# Altium PCB tester.PcbDoc
Units mm, origin at the board's own origin, x right, y up, seen from the top; angles counter-clockwise.
Board outline 84.15 x 90.65 mm, 4 copper layers (Top Layer, Layer 2, Layer 3, Bottom Layer), stack 1.369 mm thick; 130 components, 131 nets, 539 pads, 0 vias.
Unrouted connection lines stored in the file: 361.
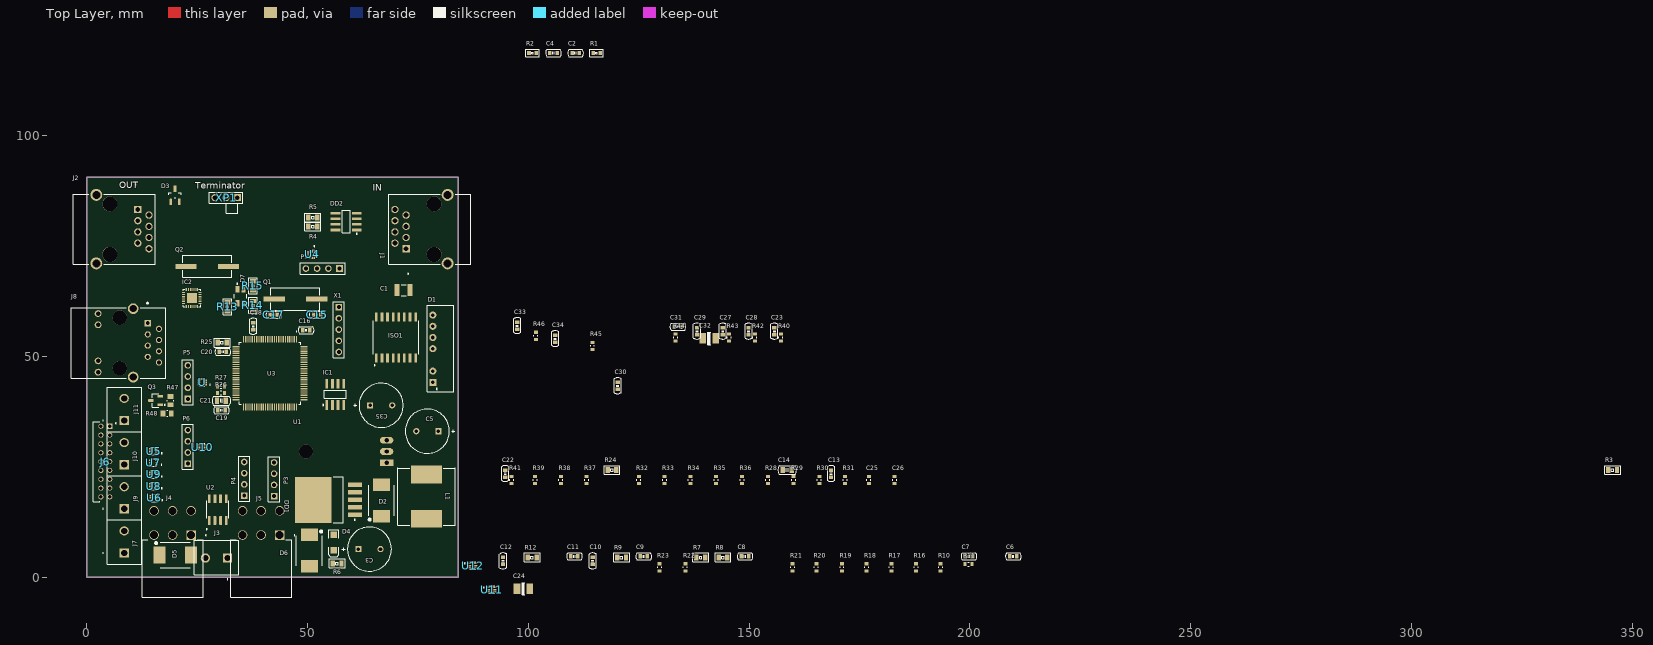
[diagram p0: Top Layer view]
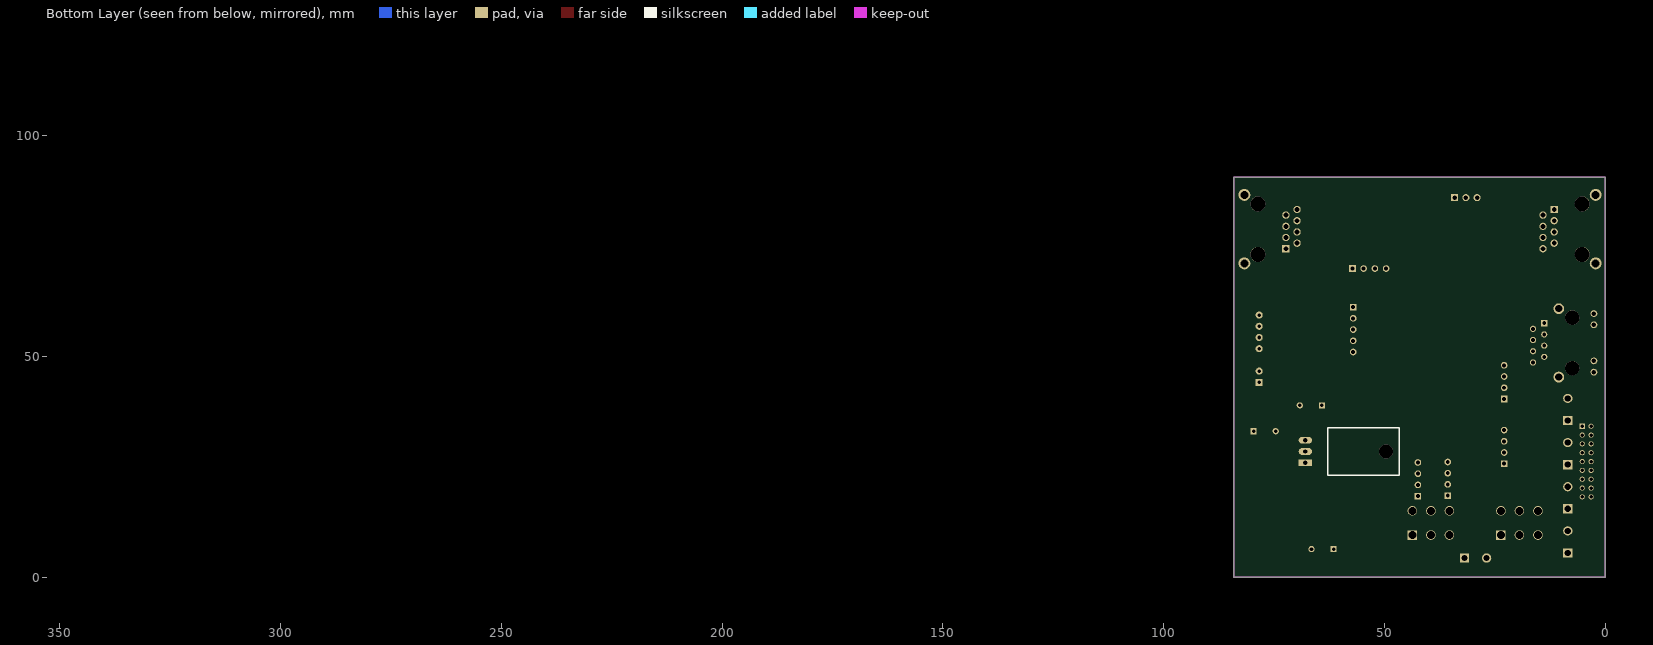
[diagram p1: Bottom Layer view, seen from below]

## Layer stack, top to bottom
Top Solder: solder mask 0.0254, SM-001, Dk 4
Top Layer: signal copper 0.035
Dielectric 1: prepreg 0.1295, PP-017, Dk 4.3
Dielectric 2: prepreg 0.1295, PP-017, Dk 4.3
Layer 2: signal copper 0.035
Dielectric 3: core 0.7112, Core-039, Dk 4.8
Layer 3: signal copper 0.035
Dielectric 4: prepreg 0.1295, PP-017, Dk 4.3
Dielectric 5: prepreg 0.1295, PP-017, Dk 4.3
Bottom Layer: signal copper 0.035
Bottom Solder: solder mask 0.0254, SM-001, Dk 4

## Board outline
0,0 0,90.65 84.15,90.65 84.15,0

## Design rules (kind name [scope] priority, off if disabled: settings)
Clearance Clearance_1 [InNetClass('ISO') vs InNet('GND')] p1: gap=1 ignorepadtopadclearanceinfootprint=FALSE
Clearance [All] p2: gap=0.15 ignorepadtopadclearanceinfootprint=FALSE
ComponentClearance [InComponentClass('J*') vs InComponentClass('J*')] p1: gap=0.01 collisioncheckmode=3 verticalgap=0.01 showdistances=FALSE
DiffPairsRouting [All] p1: maxlimit=0.254 minlimit=0.2 mostfreqgap=0.254 toplayer_minwidth=0.25 toplayer_maxwidth=0.381 toplayer_prefwidth=0.381 midlayer1_minwidth=0.25 midlayer1_maxwidth=0.381 midlayer1_prefwidth=0.381 midlayer2_minwidth=0.25 midlayer2_maxwidth=0.381 midlayer2_prefwidth=0.381 bottomlayer_minwidth=0.25 bottomlayer_maxwidth=0.381 bottomlayer_prefwidth=0.381 maxuncoupledlength=12.7
HoleSize [All] p1: absolutevalues=TRUE maxlimit=5 minlimit=0.025 maxpercent=80.000 minpercent=20.000
MinimumSolderMaskSliver [All] p1: minsoldermaskwidth=0
PolygonConnect [All] p1: connectstyle=Relief reliefconductorwidth=0.254 reliefentries=4 polygonreliefangle="90 Angle" airgapwidth=0.254
RoutingVias [All] p1: holewidth=0.3 width=1 viastyle="Through Hole" minholewidth=0.3 minwidth=0 maxholewidth=1 maxwidth=4
SilkToSolderMaskClearance [IsPad] p1: minsilkscreentomaskgap=0.1 clearancetoexposedcopper=TRUE
SolderMaskExpansion [All] p1: expansion=0.102 istentingtop=FALSE
UnRoutedNet [All] p1: checkbadconnections=TRUE
Width [All] p1: maxlimit=4 minlimit=0.254 preferedwidth=0.254
24 further rules are at their usual default settings.

## Classes and differential pairs
differential pair 485: +485_P -485_N
differential pair P1_TX: +P1_TX_P -P1_TX_N
differential pair P1_RX: +P1_RX_P -P1_RX_N

## Components (designator, comment, footprint, x,y, rotation, side; value= is the part's Value field where it differs from the comment)
C1 "10uF" CAPC3225X270N 71.775,65.05 r180 top
C2 "0.1uF" "CAPACITOR 0603" 109.923,118.727 r0 top
C3 "220uF 50v" "ECR 10x13mm" 64.05,6.4 r0 top value=220uF
C4 "0.1uF" "CAPACITOR 0603" 104.922,118.727 r0 top
C5 "220uF 50v" "ECR 10x13mm" 77.15,33.1 r180 top value=220uF
C6 "0.1uF" "CAPACITOR 0603" 209.019,4.752 r0 top
C7 "0.1uF" "CAPACITOR 0603" 198.994,4.752 r0 top
C8 "0.1uF" "CAPACITOR 0603" 148.291,4.752 r0 top
C9 "0.001uF" "CAPACITOR 0603" 125.34,4.752 r0 top
C10 "0.1uF" "CAPACITOR 0603" 114.565,2.927 r90 top
C11 "0.1uF" "CAPACITOR 0603" 109.664,4.752 r0 top
C12 "0.1uF" "CAPACITOR 0603" 94.289,2.927 r90 top
C13 "0.1uF" "CAPACITOR 0603" 168.562,22.702 r90 top
C14 "2.2uF" "CAPACITOR 0805" 157.636,24.302 r0 top
C15 "20pF" "CAPACITOR 0603" 53,59.425 r180 top
C16 "0.1uF" "CAPACITOR 0603" 50.525,55.975 r180 top
C17 "20pF" "CAPACITOR 0603" 41.575,59.425 r0 top
C18 "0.001uF" "CAPACITOR 0603" 37.725,57.675 r270 top
C19 "0.1uF" "CAPACITOR 0603" 31.35,37.85 r180 top
C20 "0.1uF" "CAPACITOR 0603" 31.675,51.075 r180 top
C21 "2.2uF" "CAPACITOR 0805" 29.525,40 r0 top
C22 "0.1uF" "CAPACITOR 0603" 94.783,22.702 r90 top
C23 "0.1uF" "CAPACITOR 0603" 155.733,54.927 r90 top
C24 "Cap T" "TECAP B" 98.9,-2.575 r0 top value="10 mkF"
C25 "100 nF" CAPCHIP0603 177.112,22.052 r90 top
C26 "100 nF" CAPCHIP0603 182.938,22.052 r90 top
C27 "0.1uF" "CAPACITOR 0603" 144.057,54.927 r90 top
C28 "0.1uF" "CAPACITOR 0603" 149.883,54.927 r90 top
C29 "0.1uF" "CAPACITOR 0603" 138.207,54.927 r90 top
C30 "0.1uF" "CAPACITOR 0603" 120.25,42.575 r90 top
C31 "1uF" "CAPACITOR 0603" 133.057,56.752 r0 top
C32 "TECAP B 10u 16V" "TECAP B" 140.982,54.102 r0 top
C33 "20pF" "CAPACITOR 0603" 97.5,56.2 r90 top
C34 "20pF" "CAPACITOR 0603" 106.075,53.25 r90 top
C35 "220uF 50v" "ECR 10x13mm" 66.7,38.95 r0 top value=220uF
D1 "AM1DS-0505SJZ" AM2D-NZ 78.4,44.155 r90 top
D2 "MBRS540T3G" DIOM7958X213N 66.775,17.4 r90 top
D3 "SM712" SOT23 20.025,86.5 r0 top
D4 "LED2" 3.2X1.6X1.1 55.975,7.875 r270 top
D5 "MBRS540T3G" DIOM7958X213N 20.075,5.075 r0 top
D6 "MBRS540T3G" DIOM7958X213N 50.45,6.05 r270 top
D7 "150141M173100" LED_150141M173100 34.825,63.65 r90 top
DD1 "LM2596S-ADJ" TO-263 54.75,17.55 r180 top
DD2 "MAX485" NSO8 58.775,80.575 r180 top
IC1 "GD25Q16CTIGR" NSO8 56.3,41.425 r90 top
IC2 "LAN8742A-CZ-TR" LAN8742A 22.575,64.525 r270 top
ISO1 "D?" *SOIC127P1030X265-16N 70.05,54.325 r90 top
J1 "A-2004-2-4-LPS-N-R" ASSMANN_A-2004-2-4-LPS-N-R 78.7,78.85 r90 top
J2 "A-2004-2-4-LPS-N-R" ASSMANN_A-2004-2-4-LPS-N-R 5.25,78.85 r270 top
J3 "TB003-500-P02BE" CUI_TB003-500-P02BE 31.9,4.375 r180 top
J4 "1586041-6" TE_1586041-6 23.675,9.575 r180 top
J5 "1586041-6" TE_1586041-6 43.725,9.575 r180 top
J6 "1-1734507-8" TE_1-1734507-8 5.25,18.225 r90 top
J7 "TB003-500-P02BE" CUI_TB003-500-P02BE 8.525,5.525 r90 top
J8 "HR911105A" HANRUN_HR911105A 7.5,53.1 r90 top
J9 "TB003-500-P02BE" CUI_TB003-500-P02BE 8.525,15.525 r90 top
J10 "TB003-500-P02BE" CUI_TB003-500-P02BE 8.525,25.525 r90 top
J11 "TB003-500-P02BE" CUI_TB003-500-P02BE 8.525,35.525 r90 top
L1 "SRR1208-6R5ML" SRR1208 76.975,18.275 r90 top
P1 "OLED" HDR1X4 57.28,69.925 r180 top
P3 "FAN1" HDR1X4 42.45,18.395 r90 top
P4 "FAN2" HDR1X4 35.7,18.51 r90 top
P5 "Encoder" HDR1X4 22.925,40.395 r90 top
P6 "Button" HDR1X4 22.925,25.73 r90 top
Q1 "12MHz" HC49SM 47.3,63.025 r0 top
Q2 "25MHz" HC49SM 27.325,70.425 r180 top
Q3 "IRLML5103TRPBF" SOT95P237X112-3N 15.625,40.05 r180 top
R1 "3K" "Resistor 0603" 114.673,118.727 r0 top
R2 "1K" "Resistor 0603" 100.172,118.727 r0 top
R3 "120" "Resistor 0805" 344.52,24.302 r0 top
R4 "10" "Resistor 0805" 52.225,79.45 r180 top
R5 "10" "Resistor 0805" 50.225,81.475 r0 top
R6 "10K" "Resistor 0805" 55.725,3.175 r0 top
R7 "10K" "Resistor 0805" 138.066,4.527 r0 top
R8 "10K" "Resistor 0805" 143.091,4.527 r0 top
R9 "10" "Resistor 0805" 120.14,4.527 r0 top
R10 "0" RESCHIP0603 193.394,2.277 r90 top
R11 "0" RESCHIP0603 199.694,3.002 r0 top
R12 "510" "Resistor 0805" 99.889,4.527 r0 top
R13 "3.9k" "Resistor 0805" 31.925,60.275 r90 top
R14 "3.9k" "Resistor 0805" 37.675,60.575 r90 top
R15 "3.9k" "Resistor 0805" 37.675,67.025 r270 top
R16 "NC" RESCHIP0603 187.818,2.277 r90 top
R17 "NC" RESCHIP0603 182.218,2.277 r90 top
R18 "0" RESCHIP0603 176.643,2.277 r90 top
R19 "0" RESCHIP0603 171.042,2.277 r90 top
R20 "0" RESCHIP0603 165.217,2.277 r90 top
R21 "0" RESCHIP0603 159.867,2.277 r90 top
R22 "0" RESCHIP0603 135.591,2.277 r90 top
R23 "0" RESCHIP0603 129.74,2.277 r90 top
R24 "10K" "Resistor 0805" 117.959,24.302 r0 top
R25 "10K" "Resistor 0805" 29.7,53.15 r0 top
R26 "0" RESCHIP0603 30.4,41.75 r180 top
R27 "0" RESCHIP0603 30.425,43.25 r180 top
R28 "50R" RESCHIP0603 154.236,22.052 r90 top
R29 "50R" RESCHIP0603 160.086,22.052 r90 top
R30 "50R" RESCHIP0603 165.937,22.052 r90 top
R31 "50R" RESCHIP0603 171.762,22.052 r90 top
R32 "10k" RESCHIP0603 125.035,22.052 r90 top
R33 "10k" RESCHIP0603 130.885,22.052 r90 top
R34 "10k" RESCHIP0603 136.71,22.052 r90 top
R35 "10k" RESCHIP0603 142.561,22.052 r90 top
R36 "10k" RESCHIP0603 148.411,22.052 r90 top
R37 "33R" RESCHIP0603 113.234,22.052 r90 top
R38 "33R" RESCHIP0603 107.409,22.052 r90 top
R39 "10k" RESCHIP0603 101.559,22.052 r90 top
R40 "33R" RESCHIP0603 157.183,54.277 r90 top
R41 "12.1k" RESCHIP0603 96.233,22.052 r90 top
R42 "220 Ом" RESCHIP0603 151.333,54.277 r90 top
R43 "33R" RESCHIP0603 145.507,54.277 r90 top
R44 "220 Ом" RESCHIP0603 133.382,54.277 r90 top
R45 "10k" RESCHIP0603 114.55,52.425 r90 top
R46 "10k" RESCHIP0603 101.725,54.7 r90 top
R47 "10k" RESCHIP0805 19,40.025 r90 top
R48 "10" RESCHIP0805 18.225,37.125 r180 top
U "USBLC6-2P6" SOT50P160X60-6N 26.15,44.125 r180 top
U1 "LM1117T-3.3" TO-220-KCS0003B 67.925,28.5 r90 top
U2 "ACS712ELCTR-05B-T" SOIC127P600X175-8N 29.7,15.35 r90 top
U3 "STM32F303V" QFP50P1600X1600X160-100N 41.525,46.225 r270 top
U4 "USBLC6-2P6" SOT50P160X60-6N 51.075,73.185 r270 top
U5 "USBLC6-2P6" SOT50P160X60-6N 15.2,28.6 r180 top
U6 "USBLC6-2P6" SOT50P160X60-6N 15.3,18 r180 top
U7 "USBLC6-2P6" SOT50P160X60-6N 15.15,25.975 r180 top
U8 "USBLC6-2P6" SOT50P160X60-6N 15.225,20.675 r180 top
U9 "USBLC6-2P6" SOT50P160X60-6N 15.2,23.35 r180 top
U10 "USBLC6-2P6" SOT50P160X60-6N 26.15,29.5 r180 top
U11 "USBLC6-2P6" SOT50P160X60-6N 91.74,-2.775 r0 top
U12 "USBLC6-2P6" SOT50P160X60-6N 87.433,2.676 r0 top
X1 "PLS-5" PLS-5-3D 57.1,61.19 r270 top
XP1 "Term120" ZL201-3 31.6,85.975 r180 top

## Footprints (in the part's own frame and the unit in brackets; to place one, negate y for a bottom-side part, rotate by r counter-clockwise, add the part's x,y. Pads: shape width x height; smd on the part's side, far side on the other; paste and mask are expansions set on the pad)
3.2X1.6X1.1 [mm] "SMT LED; 2 Flat Leads"
  rect 1.5x1.5 smd: 1(-1.75,0) 2(1.75,0)
  silkscreen extent -2.9,-1.15 3.2,1.15
*SOIC127P1030X265-16N [mm]
  rect 2.06x0.6 smd: 1(-4.64,4.445) 2(-4.64,3.175) 3(-4.64,1.905) 4(-4.64,0.635) 5(-4.64,-0.635) 6(-4.64,-1.905) 7(-4.64,-3.175) 8(-4.64,-4.445) 9(4.64,-4.445) 10(4.64,-3.175) 11(4.64,-1.905) 12(4.64,-0.635) 13(4.64,0.635) 14(4.64,1.905) 15(4.64,3.175) 16(4.64,4.445)
  silkscreen extent -6.4,-5.15 3.75,5.15
AM2D-NZ [mm]
  rect 1.6x1.6 hole 0.8: 1(0,0)
  round 1.6 hole 0.8: 2(2.54,0) 4(7.62,0) 5(10.16,0) 6(12.7,0) 7(15.24,0)
  silkscreen extent -2.15,-4.75 17.5,1.25
ASSMANN_A-2004-2-4-LPS-N-R [mm]
  rect 1.65x1.65 hole 1.1: 1(-4.445,6.35)
  round 1.65 hole 1.1: 2(-3.175,8.89) 3(-1.905,6.35) 4(-0.635,8.89) 5(0.635,6.35) 6(1.905,8.89) 7(3.175,6.35) 8(4.445,8.89)
  round 2.7 hole 1.8: S1(-7.75,-3.05) S2(7.75,-3.05)
  round 3.4 hole 3.4 unplated: ""(-5.715,0) ""(5.715,0)
  silkscreen extent -10.21,-8.3 7.9,10.3
"CAPACITOR 0603" [mm]
  rect 0.8x1 smd: 1(0,0) 2(1.6,0)
  silkscreen extent -0.97,-0.8 2.6,0.8, body extent -0.01,-0.38 1.64,0.42, height 0.81
"CAPACITOR 0805" [mm]
  rect 1x1.4 smd: 1(0,0) 2(2,0)
  silkscreen extent -1.12,-1 3.12,1, body extent 0.01,-0.6 2.01,0.6, height 1.26
CAPC3225X270N [mm] "Chip Capacitor, Body 3.2x2.5mm, IPC Medium Density"
  rect 1.15x2.7 smd: 1(-1.5,0) 2(1.5,0)
  silkscreen extent -0.55,-1.25 0.55,1.25, body extent -1.7,-1.35 1.7,1.35, height 2.7
CAPCHIP0603 [mm] "Chip Capacitor, 2-Leads, Body 1,6x0,8mm"
  rect 0.7x0.9 smd mask+0.06: 1(-0.8,0) 2(0.8,0)
  silkscreen extent -0.15,-0.45 0.15,0.45, body extent -0.8,-0.4 0.8,0.4, height 0.9
CUI_TB003-500-P02BE [mm]
  rect 2.1x2.1 hole 1.4: 1(0,0)
  round 2.1 hole 1.4: 2(5,0)
  silkscreen extent -2.5,-4 7.5,4.9
DIOM7958X213N [mil]
  rect 110x150 smd: A(140.49,0) C(-140.49,0)
  silkscreen extent -176,-115 135,115
"ECR 10x13mm" [mm] "Rad Capacitor 50В-220мкФ"
  rect 1.4x1.4 hole 0.8 mask+0.06: 1(-2.5,0)
  round 1.4 hole 0.8 mask+0.06: 2(2.5,0)
  silkscreen extent -6.22,-5 5,5, body extent -5,-5 4.97,5, height 12.51
HANRUN_HR911105A [mm]
  rect 1.398x1.398 hole 0.89: 1(4.45,-6.35)
  round 1.398 hole 0.89: 2(3.18,-8.89) 3(1.91,-6.35) 4(0.64,-8.89) 5(-0.63,-6.35) 6(-1.9,-8.89) 7(-3.17,-6.35) 8(-4.44,-8.89)
  round 1.53 hole 1.02: 9(6.625,4.9) 10(4.085,4.9) 11(-4.085,4.9) 12(-6.625,4.9)
  round 2.445 hole 1.63: 15(7.745,-3.05) 16(-7.745,-3.05)
  round 3.25 hole 3.25 unplated: ""(-5.715,0) ""(5.715,0)
  silkscreen extent -8,-10.48 9.15,10.92, body extent -7.94,-10.49 7.94,10.91, height 13.6
HC49SM [mm] "Quartz crystal resonator"
  rect 4.8x1.1 smd mask+0.06: 1(-4.8,0) 2(4.8,0)
  silkscreen extent -5.55,-2.5 5.55,2.5, body extent -6.7,-2.45 6.7,2.45, height 5.09
HDR1X4 [mm] "Connector; Header; 4 Position"
  rect 1.5x1.5 hole 0.9: 1(0,0)
  round 1.5 hole 0.9: 2(2.54,0) 3(5.08,0) 4(7.62,0)
  silkscreen extent -1.27,-1.27 8.89,1.27
LAN8742A [mm]
  rrect50% 0.69x0.28 smd: 1(-0.645,2.5) 2(-0.645,2) 3(-0.645,1.5) 4(-0.645,1) 5(-0.645,0.5) 6(-0.645,0) 13(3.145,0) 14(3.145,0.5) 15(3.145,1) 16(3.145,1.5) 17(3.145,2) 18(3.145,2.5)
  rrect50% 0.28x0.69 smd: 7(0,-0.645) 8(0.5,-0.645) 9(1,-0.645) 10(1.5,-0.645) 11(2,-0.645) 12(2.5,-0.645) 19(2.5,3.145) 20(2,3.145) 21(1.5,3.145) 22(1,3.145) 23(0.5,3.145) 24(0,3.145)
  rect 2.286x2.286 smd: 25(1.25,1.25)
  silkscreen extent -0.75,-0.74 3.26,3.27, body extent -0.75,-0.74 3.26,3.27, height 1
LED_150141M173100 [mm]
  rect 1.5x0.9 smd: 1(1.55,0.7) 2(1.55,-0.7) 3(-1.55,0.7) 4(-1.55,-0.7)
  silkscreen extent -0.5,-1.4 2.92,1.4
NSO8 [mm] "SOIC, 8-Leads, Body 4.9x3.9mm, Pitch 1.27mm"
  rect 2.2x0.6 smd mask+0.06: 1(-2.4,1.905) 2(-2.4,0.635) 3(-2.4,-0.635) 4(-2.4,-1.905) 5(2.4,-1.905) 6(2.4,-0.635) 7(2.4,0.635) 8(2.4,1.905)
  silkscreen extent -2.53,-2.5 0.9,2.88, body extent -3,-2.45 3,2.45, height 1.7
PLS-5-3D [mm] "Connector; Header; 5 Position"
  rect 1.5x1.5 hole 0.9: 1(0,0)
  round 1.5 hole 0.9: 2(2.54,0) 3(5.08,0) 4(7.62,0) 5(10.16,0)
  silkscreen extent -1.27,-1.27 11.43,1.27, body extent -1.27,-1.27 11.43,1.27, height 8.44
QFP50P1600X1600X160-100N [mm]
  rrect25% 1.56x0.28 smd: 1(-7.68,6) 2(-7.68,5.5) 3(-7.68,5) 4(-7.68,4.5) 5(-7.68,4) 6(-7.68,3.5) 7(-7.68,3) 8(-7.68,2.5) 9(-7.68,2) 10(-7.68,1.5) 11(-7.68,1) 12(-7.68,0.5) 13(-7.68,0) 14(-7.68,-0.5) 15(-7.68,-1) 16(-7.68,-1.5) 17(-7.68,-2) 18(-7.68,-2.5) 19(-7.68,-3) 20(-7.68,-3.5) 21(-7.68,-4) 22(-7.68,-4.5) 23(-7.68,-5) 24(-7.68,-5.5) 25(-7.68,-6) 51(7.68,-6) 52(7.68,-5.5) 53(7.68,-5) 54(7.68,-4.5) 55(7.68,-4) 56(7.68,-3.5) 57(7.68,-3) 58(7.68,-2.5) 59(7.68,-2) 60(7.68,-1.5) 61(7.68,-1) 62(7.68,-0.5) 63(7.68,0) 64(7.68,0.5) 65(7.68,1) 66(7.68,1.5) 67(7.68,2) 68(7.68,2.5) 69(7.68,3) 70(7.68,3.5) 71(7.68,4) 72(7.68,4.5) 73(7.68,5) 74(7.68,5.5) 75(7.68,6)
  rrect25% 0.28x1.56 smd: 26(-6,-7.68) 27(-5.5,-7.68) 28(-5,-7.68) 29(-4.5,-7.68) 30(-4,-7.68) 31(-3.5,-7.68) 32(-3,-7.68) 33(-2.5,-7.68) 34(-2,-7.68) 35(-1.5,-7.68) 36(-1,-7.68) 37(-0.5,-7.68) 38(0,-7.68) 39(0.5,-7.68) 40(1,-7.68) 41(1.5,-7.68) 42(2,-7.68) 43(2.5,-7.68) 44(3,-7.68) 45(3.5,-7.68) 46(4,-7.68) 47(4.5,-7.68) 48(5,-7.68) 49(5.5,-7.68) 50(6,-7.68) 76(6,7.68) 77(5.5,7.68) 78(5,7.68) 79(4.5,7.68) 80(4,7.68) 81(3.5,7.68) 82(3,7.68) 83(2.5,7.68) 84(2,7.68) 85(1.5,7.68) 86(1,7.68) 87(0.5,7.68) 88(0,7.68) 89(-0.5,7.68) 90(-1,7.68) 91(-1.5,7.68) 92(-2,7.68) 93(-2.5,7.68) 94(-3,7.68) 95(-3.5,7.68) 96(-4,7.68) 97(-4.5,7.68) 98(-5,7.68) 99(-5.5,7.68) 100(-6,7.68)
  silkscreen extent -9.54,-7 7,7
RESCHIP0603 [mm] "Chip Resistor, 2-Leads, Body 1,6x0,8mm"
  rect 0.7x0.9 smd mask+0.06: 1(-0.8,0) 2(0.8,0)
  silkscreen extent -0.15,-0.45 0.15,0.45, body extent -0.8,-0.4 0.8,0.4, height 0.4
RESCHIP0805 [mm] "Chip Resistor, 2-Leads, Body 2,0x1,3mm"
  rect 1.1x1.4 smd mask+0.06: 1(-0.95,0) 2(0.95,0)
  silkscreen extent -0.1,-0.7 0.1,0.7, body extent -1,-0.62 1,0.63, height 0.5
"Resistor 0603" [mm]
  rect 0.8x1 smd: 1(0,0) 2(1.6,0)
  silkscreen extent -0.72,-0.8 2.35,0.8, body extent -0.03,-0.45 1.63,0.45, height 0.46
"Resistor 0805" [mm]
  rect 1x1.4 smd: 1(0,0) 2(2,0)
  silkscreen extent -0.8,-1 2.8,1, body extent -0.03,-0.65 2.02,0.65, height 0.41
SOIC127P600X175-8N [mm]
  rrect25% 1.97x0.6 smd: 1(-2.475,1.905) 2(-2.475,0.635) 3(-2.475,-0.635) 4(-2.475,-1.905) 5(2.475,-1.905) 6(2.475,-0.635) 7(2.475,0.635) 8(2.475,1.905)
  silkscreen extent -4.54,-2.52 2,2.6
SOT23 [mm] "Корпус"
  oval 0.6x1.5 smd: 1(-0.95,-1.475)
  rect 0.6x1.5 smd: 2(0.95,-1.475) 3(0,1.475)
  silkscreen extent -1.45,-0.53 1.45,0.55, body extent -1.5,-1.27 1.5,1.27, height 1.1
SOT50P160X60-6N [mm]
  rrect8% 0.75x0.35 smd: 1(-0.69,0.5) 2(-0.69,0) 3(-0.69,-0.5) 4(0.69,-0.5) 5(0.69,0) 6(0.69,0.5)
  silkscreen extent -1.9,-0.85 0.65,0.85
SOT95P237X112-3N [mm]
  rrect50% 1.23x0.59 smd: 1(-1.06,0.95) 2(-1.06,-0.95) 3(1.06,0)
  silkscreen extent -2.2,-1.56 0.7,1.56
SRR1208 [mm]
  rect 4x7 smd: P$1(-5,0) P$2(5,0)
  silkscreen extent -6.5,-6.5 6.5,6.5
TE_1-1734507-8 [mm]
  rect 1.15x1.15 hole 0.8: 1(16,0)
  round 1.15 hole 0.8: 2(16,2) 3(14,0) 4(14,2) 5(12,0) 6(12,2) 7(10,0) 8(10,2) 9(8,0) 10(8,2) 11(6,0) 12(6,2) 13(4,0) 14(4,2) 15(2,0) 16(2,2) 17(0,0) 18(0,2)
  silkscreen extent -1.05,-1.5 17,3.75, body extent -2.08,-0.25 18.02,9.1, height 6.26
TE_1586041-6 [mm]
  rect 2.15x2.15 hole 1.8: 1(0,0)
  round 2.15 hole 1.8: 2(0,-5.5) 3(4.2,0) 4(4.2,-5.5) 5(8.4,0) 6(8.4,-5.5)
  silkscreen extent -3.45,-0.1 11.1,14.1, body extent -3.18,-5.97 11.12,14.17, height 11.8
"TECAP B" [mm] "Chip Capacitor, 2-Leads, Body 3,5x2,8mm"
  rect 1.5x2.4 smd mask+0.06: 1(-1.45,0) 2(1.45,0)
  silkscreen extent -0.3,-1.4 0.3,1.4, body extent -1.75,-1.4 1.75,1.4, height 1.92
TO-220-KCS0003B [mil]
  rect 60x120 hole 40: 1(-100,0)
  oval 60x120 hole 40: 2(0,0) 3(100,0)
  round 125 hole 125 unplated: ""(0,718.5)
  body extent -190,-97 200,827
TO-263 [mm] "D2-PAK, 6-Leads, Body 8.6x10.2mm, Pitch 1.7mm, Lead Span 14.1mm"
  rect 3.2x1.05 smd mask+0.06: 1(-6,3.4) 2(-6,1.7) 3(-6,0) 4(-6,-1.7) 5(-6,-3.4)
  rect 8.3x10.45 smd mask+0.06: 6(3.45,0)
  silkscreen extent -6.13,-5.2 -1.1,5.2, body extent -7.18,-5.08 7.46,5.08, height 4.57
ZL201-3 [mm] "Connector; PLS-3; pitch 2.54"
  rect 1.6x1.6 hole 1 mask+0.06: 1(-2.54,0)
  round 1.6 hole 1 mask+0.06: 2(0,0) 3(2.54,0)
  silkscreen extent -3.81,-1.27 3.81,1.27, body extent -3.81,-1.27 3.81,1.27, height 8.44

## Part data
C1 C2 C4 C6 C7 C8 C9 C10 C11 C12 C13 C14 C15 C16 C17 C18 C19 C20 C21 C22 C23 C27 C28 C29 C30 C31 C33 C34: library part Capasitor
C3 C5 C35: library part "Cap Pol", "Polarized Capacitor (Rad)", Voltage=50, Type=Type, URL=http://www.hitano.com.tw/PDF/ECR_081225.pdf
C24: "Solid Tantalum Surface Mount Capacitors", Voltage=6v, Type=Type
C25 C26: library part "Cap C", "Керамическтй конденсатор SMD C0603", Type=0603
C32: library part "Cap T", "Solid Tantalum Surface Mount Capacitors", Voltage=16V, Type="TECAP B"
D2 D5 D6: "Diode Schottky 40V 5A Surface Mount SMC", Package="DO-214 ON Semiconductor", Availability=Unavailable, MF="ON Semiconductor", MP=MBRS540T3G, Price=None, SnapEDA_Link=https://www.snapeda.com/parts/MBRS540T3G/ON%20Semiconductor/view-part/78777/?ref=snap
D3: "Asymmetrical TVS Diode for Extended Common-Mode RS-485"
D4: "Typical RED, GREEN, YELLOW, AMBER GaAs LED", LatestRevisionDate=17-Jul-2002, LatestRevisionNote="Re-released for DXP Platform.", PackageDescription="SM LED; 2 Flat Leads", PackageReference=3.2X1.6X1.1, PackageVersion=Feb-2002, Published=8-Jun-2000, Publisher="Altium Limited"
D7: "Red, Green, Blue _RGB_ 625nm Red, 520nm Green, 470nm Blue LED Indication - Discrete 2V Red, 3.2V Green, 3.2V Blue 1411 _3528 Metric_", Package="1411 WÃ¼rth Elektronik", Availability=Unavailable, MF="Wurth Electronics", MP=150141M173100, Price=None, SnapEDA_Link=https://www.snapeda.com/parts/150141M173100/Wurth%20Electronics%20Inc./view-part/281733/?ref=snap
DD1: "SIMPLE SWITCHER® Power Converter 150 KHz 3A Step-Down Voltage Regulator, 5-pin TO-263", Manufacturer="National Semiconductor", ComponentLink1URL=http://www.national.com/ds/LM/LM2596.pdf, ComponentLink2URL=http://www.national.com/pf/LM/LM2596.html, ComponentLink3URL=http://www.national.com/packaging/folders/ts5b.html, CompType=Switcher, PartNumber=LM2596S-ADJ, Published=13.04.2012, Publisher="Reukov A.V."
DD2: "Low-Power, Slew-Rate-Limited RS-485/RS-422 Transceiver", ComponentLink1URL=http://pdfserv.maxim-ic.com/en/ds/MAX1487-MAX491.pdf, Type=MAX485
IC1: library part W25Q128FVEIG, "128M-bit Serial Flash Memory with uniform 4KB sectors and Dual/Quad SPI and QPI"
ISO1: library part ISO7341
J1 J2: "Jack Modular Connector 8p8c _RJ45, Ethernet_ 90Â° Angle _Right_ Shielded", Package=None, Availability=Unavailable, MF="Assmann WSW", MP=A-2004-2-4-LPS-N-R, Price=None, SnapEDA_Link=https://www.snapeda.com/parts/A-2004-2-4-LPS-N-R/Assmann%20WSW%20Components/view-part/454861/?ref=snap
J3 J7 J9 J10 J11: "2~24 Poles, Screw Type, Horizontal, 5.0 Pitch, 26~14 _AWG_, Terminal Block Connector", Package=None, Availability=Unavailable, MF="CUI Devices", MP=TB003-500-P02BE, Price=None, SnapEDA_Link=https://www.snapeda.com/parts/TB003-500-P02BE/CUI%20Devices/view-part/3590637/?ref=snap
J4 J5 J6: Package=None, Availability=Unavailable, Price=None
  J4 J5: MP=1586041-6
  J6: MP=1-1734507-8
J8: "HR911105A Ethernet Interface Arduino Platform Evaluation Expansion Board", Package=None, Availability=Unavailable, MF=DFRobot, MP=HR911105A, Price=None, SnapEDA_Link=https://www.snapeda.com/parts/HR911105A/DFRobot/view-part/214807/?ref=snap
L1: "6.5ÂµH Shielded Wirewound Inductor 6A 18mOhm Max Nonstandard", Package="Nonstandard Bourns", Availability=Unavailable, MF=Bourns, MP=SRR1208-6R5ML, Price=None, SnapEDA_Link=https://www.snapeda.com/parts/SRR1208-6R5ML/Bourns/view-part/353452/?ref=snap
P1 P3 P4 P5 P6: library part "Header 4", "Header, 4-Pin", LatestRevisionDate=17-Jul-2002, LatestRevisionNote="Re-released for DXP Platform.", Publisher="Altium Limited"
Q1 Q2: library part "Quartz Crystal", "Quartz Crystal"
Q3: "RoHS Compliant", Package=None, Availability=Unavailable, MP=IRLML5103TRPBF, Price=None
R1 R2 R3 R4 R5 R6 R7 R8 R9 R12 R13 R14 R15 R24 R25: library part Resistor
R10 R11 R16 R17 R18 R19 R20 R21 R22 R23 R26 R27: library part Res, "303V", Power_W={Power_W}, Tolerance_Percent={Tolerance_Percent}, Body={Body}, Installation={Installation}, Ordering_Information={Ordering_Information}, Pins=2, SubClass=Резисторы
  R10 R11 R18 R19 R26 R27: Class=303V
  R20 R21 R22 R23: Class=407V
R28 R29 R30 R31 R32 R33 R34 R35 R36 R37 R38 R39 R40 R41 R43 R45 R46 R47 R48: library part Res, "Резистор", Power_W={Power_W}, Tolerance_Percent={Tolerance_Percent}, Body={Body}, Class="Электронные компоненты", Installation={Installation}, Ordering_Information={Ordering_Information}, Pins=2, SubClass=Резисторы
R42 R44: library part Res, "Резистор SMD R0603", Tolerance=%, PWR=Value, Type=0603
U U4 U5 U6 U7 U8 U9 U10 U11 U12: "17V Clamp 5A _8/20Âµs_ Ipp Tvs Diode Surface Mount SOT-666", Package="SOT-563 STMicroelectronics", Availability=Unavailable, MF=STMicroelectronics, MP=USBLC6-2P6, Price=None, SnapEDA_Link=https://www.snapeda.com/parts/USBLC6-2P6/STMicroelectronics/view-part/106846/?ref=snap
U1: "Linear Voltage Regulator IC 1 Output 800mA TO-220-3", Package="TO-220 Texas Instruments", Availability=Unavailable, MF="Texas Instruments", MP=LM1117T-3.3, Price=None, SnapEDA_Link=https://www.snapeda.com/parts/LM1117T-3.3/Texas%20Instruments/view-part/103788/?ref=snap
U2: "Current Sensor 5A 1 Channel Hall Effect, Open Loop Bidirectional 8-SOIC _0.154, 3.90mm Width_", Package="SOIC-8 Allegro MicroSystems LLC", Digi-Key_Part_Number=620-1189-1-ND, Digi-Key_Purchase_URL=https://www.digikey.in/product-detail/en/allegro-microsystems/ACS712ELCTR-05B-T/620-1189-1-ND/1284606?utm_source=snapeda&utm_medium=aggregator&utm_campaign=symbol, MF="Allegro MicroSystems LLC", MP=ACS712ELCTR-05B-T, SnapEDA_Link=https://www.snapeda.com/parts/ACS712ELCTR-05B-T/Allegro%20MicroSystems%20LLC/view-part/46765/?ref=snap
U3: "ARMÂ® CortexÂ®-M4 STM32F3 Microcontroller IC 32-Bit 72MHz 100-LQFP (14x14)", Package="LQFP-100 STMicroelectronics", Availability=Unavailable, MF=STMicroelectronics, MP=STM32F303V, Price=None
X1: "Header, 5-Pin", LatestRevisionDate=17-Jul-2002, LatestRevisionNote="Re-released for DXP Platform.", Publisher="Altium Limited"
XP1: library part "Select jump", "Ter120", Class="Электронные компоненты", Installation=DIP, Ordering_Information={Ordering_Information}, Pins=3, Pitch_mm={Pitch_mm}, SubClass=Разъемы, Type_of_connector={Type_of_connector}

## Nets (pads, with @x,y where several pads share a name; then routed paths per layer and width w, separated by ;. In a path a pad name is that pad's centre, name@x,y a point inside that pad or via, vN(x,y) a via of type N, cw(c..) or ccw(c..) an arc to the next point about the centre after c; other vN are vias at no path point)
3.3v: C18.2 U3.21 U3.22
485_N: D3.1 J1.2 J2.2 R3.2 R5.1
485_P: D3.2 J1.1 J2.1 R4.1 XP1.1
+3.3v: C6.1 C11.1 C12.1 C13.1 C16.2 C19.1 C20.1 C22.1 C23.1 C24.1 C25.1 C26.1 C27.1 C28.2 C29.1 C32.1 C35.1 D7.1 IC1.8 IC2.1 IC2.9 IC2.19 ISO1.1 ISO1.7 J8.4 J8.5 J8.9 J8.12 P1.1 P5.1 Q3.2 R28.2 R29.2 R30.2 R31.2 R32.2 R33.2 R34.2 R35.2 R36.2 R47.2 U1.2 U3.6 U3.28 U3.50 U3.75 U3.100 U4.5 U5.5 U6.5 U7.5 U8.5 U9.5 U10.5 U11.5 U12.5 U.5 X1.5
+5v: C4.2 C5.1 D1.1 L1.P$2 R1.2 U1.3 U2.8
+5v_ISO: C1.2 C7.2 C8.2 D1.7 DD2.8 ISO1.10 ISO1.16 R8.1
+5v_RJ: J1.4 J2.4
A1: U3.58 U9.3
A1_z: J6.11 J10.2 U9.4
A2: J10.1 U3.61 U9.6
A2_z: J6.14 U9.1
AN1: C10.2 R9.2 R24.2
DE: ISO1.4 U3.85
DIR_B3: U3.55 U8.3
DIR_B3_z: J9.2 P6.1 U8.4
EN_A0: U3.57 U7.1
EN_A0_z: J6.12 J7.2 U7.6
EN_PLUG: U3.56 U8.1
EN_PLUG_z: J6.13 J9.1 U8.6
Encoder_1: U3.59 U.3
Encoder_2: U3.60 U.1
Eth_NRST: IC2.15 U3.23
FAN1_IN: U3.31 U11.1
FAN1_OUT: U3.40 U11.3
FAN2_IN: U3.91 U12.1
FAN2_OUT: U3.42 U12.3
GND: C2.1 C3.2 C4.1 C5.2 C6.2 C9.1 C10.1 C11.2 C12.2 C13.2 C14.2 C15.1 C16.1 C17.1 C18.1 C19.2 C20.2 C21.1 C22.2 C23.2 C24.2 C25.2 C26.2 C27.2 C28.1 C29.2 C30.2 C31.2 C32.2 C33.1 C34.1 C35.2 D1.2 D2.A DD1.3 DD1.5 DD1.6 IC1.4 IC2.25 ISO1.2 ISO1.8 J1.8 J2.8 J3.1 J5.2 J5.4 J5.6 J6.5 J6.6 J6.9 J6.10 J6.17 J6.18 J7.1 J8.15 J8.16 P1.2 P3.1 P4.1 P5.4 P6.4 R2.2 R6.2 R12.2 R25.1 R39.1 R41.2 R45.1 R46.1 U1.1 U2.3 U2.4 U2.5 U3.20 U3.27 U3.74 U3.99 U4.2 U5.2 U6.2 U7.2 U8.2 U9.2 U10.2 U11.2 U12.2 U.2 X1.3
GND_ISO: C1.1 C7.1 C8.1 D1.5 D3.3 DD2.5 ISO1.9 ISO1.15 J1.3 J1.S1 J1.S2 J2.3 J2.S1 J2.S2 R7.2
NetC9_2: C9.2 U2.6
NetC14_1: C14.1 U3.73
NetC15_2: C15.2 Q1.2 U3.12
NetC17_2: C17.2 Q1.1 U3.13
NetC21_2: C21.2 U3.49
NetC30_1: C30.1 C31.1 IC2.6
NetC33_2: C33.2 IC2.4 Q2.1
NetC34_2: C34.2 IC2.5 Q2.2
NetD2_C: D2.C DD1.2 L1.P$1
NetD4_2: D4.2 R6.1
NetD5_A: D5.A J3.2
NetD6_A: D6.A J4.1 J4.3 J4.5 J5.1 J5.3 J5.5
NetD7_2: D7.2 R15.2
NetD7_3: D7.3 R13.2
NetD7_4: D7.4 R14.2
NetDD1_4: DD1.4 R1.1 R2.1
NetDD2_1: DD2.1 ISO1.11 R8.2
NetDD2_2: DD2.2 DD2.3 ISO1.13 R7.1
NetDD2_4: DD2.4 ISO1.12
NetDD2_6: DD2.6 R5.2
NetDD2_7: DD2.7 R4.2
NetIC1_1: IC1.1 U3.77
NetIC1_2: IC1.2 U3.79
NetIC1_3: IC1.3 U3.81
NetIC1_5: IC1.5 U3.80
NetIC1_6: IC1.6 U3.78
NetIC1_7: IC1.7 U3.82
NetIC2_2: IC2.2 R44.1 R46.2
NetIC2_3: IC2.3 R42.1 R45.2
NetIC2_7: IC2.7 R33.1 R38.2
NetIC2_8: IC2.8 R32.1 R37.2
NetIC2_10: IC2.10 R39.2
NetIC2_11: IC2.11 R34.1 R40.2
NetIC2_14: IC2.14 R35.1 R43.2
NetIC2_24: IC2.24 R41.1
NetJ1_5: J1.5 J2.5
NetJ1_6: J1.6 J2.6
NetJ4_2: J4.2 J4.4 J4.6 U2.1 U2.2
NetJ6_3: J6.3 U7.4
NetJ6_4: J6.4 Q3.3
NetJ6_7: J6.7 U5.6
NetJ6_8: J6.8 U5.4
NetJ6_15: J6.15 U6.6
NetJ6_16: J6.16 U6.4
NetJ8_10: J8.10 R42.2
NetJ8_11: J8.11 R44.2
NetP1_3: P1.3 U4.6
NetP1_4: P1.4 U4.4
NetP3_3: P3.3 U11.6
NetP3_4: P3.4 U11.4
NetP4_3: P4.3 U12.6
NetP4_4: P4.4 U12.4
NetP5_2: P5.2 U.6
NetP5_3: P5.3 U.4
NetQ3_1: Q3.1 R47.1 R48.2
NetR3_1: R3.1 XP1.2
NetR9_1: R9.1 U2.7
NetR10_1: R10.1 U3.98
NetR11_1: R11.1 U3.97
NetR12_1: R12.1 U3.94
NetR13_1: R13.1 U3.7
NetR14_1: R14.1 U3.8
NetR15_1: R15.1 U3.9
NetR18_1: R18.1 R20.1 U3.69
NetR19_1: R19.1 R21.1 U3.68
NetR22_1: R22.1 U3.64
NetR23_1: R23.1 U3.63
NetR24_1: R24.1 R25.2 U3.26
NetR26_1: R26.1 U3.47
NetR27_1: R27.1 U3.46
NetU3_72: U3.72 X1.2
NetU3_76: U3.76 X1.4
OLED_CLK: R19.2 U3.67 U4.1
OLED_DAT: R18.2 U3.66 U4.3
P1_RX_N: IC2.22 J8.6 R28.1
P1_RX_P: IC2.23 J8.3 R29.1
P1_TX_N: IC2.20 J8.2 R30.1
P1_TX_P: IC2.21 J8.1 R31.1
PIC_SCL: U3.92 U6.3
PIC_SDA: U3.93 U6.1
PWR3v: R48.1 U3.62
RESET: U3.14 X1.1
RESET_A: U3.70 U7.3
RMII_CRS_DV: R40.1 U3.32
RMII_MDC: IC2.13 U3.16
RMII_MDIO: IC2.12 R36.1 U3.25
RMII_REF_CLK: R43.1 U3.24
RMII_RXD0: R37.1 U3.33
RMII_RXD1: R38.1 U3.34
RMII_TX_EN: IC2.16 U3.48
RMII_TXD0: IC2.17 U3.51
RMII_TXD1: IC2.18 U3.52
RX: ISO1.6 U3.87
TIM15_CH1_B1: U3.53 U10.1
TIM15_CH1_B1_z: J11.1 P6.2 U10.6
TIM15_CH2_B2: U3.54 U10.3
TIM15_CH2_B2_z: J11.2 P6.3 U10.4
TX: ISO1.5 U3.86
UART_1_RX: R10.2 R17.2 R20.2
UART_1_TX: R11.2 R16.1 R21.2 U5.1
UART_2_RX: R17.1 R22.2 R27.2 U5.3
UART_2_TX: R16.2 R23.2 R26.2
V_24pwr: C2.2 C3.1 D4.1 D5.C D6.C DD1.1 J1.7 J2.7 P3.2 P4.2
pads on no net: D1.4 D1.6 ISO1.3 ISO1.14 J1. J2. J6.1 J6.2 J8. J8.7 J8.8 U1. U3.1 U3.2 U3.3 U3.4 U3.5 U3.10 U3.11 U3.15 U3.17 U3.18 U3.19 U3.29 U3.30 U3.35 U3.36 U3.37 U3.38 U3.39 U3.41 U3.43 U3.44 U3.45 U3.65 U3.71 U3.83 U3.84 U3.88 U3.89 U3.90 U3.95 U3.96 XP1.3

## Keep-outs
Keep-Out Layer:
  the board outline again, w0.3

## Silkscreen, mask and mechanical layers (free items; w line width, h text height)
Top Overlay:
  lines w0.2: 31.6,84.705 31.6,82.475 34.25,82.475 34.25,84.675
  text "OUT" at 7.404,88.129 h1.52
  text "Terminator" at 24.629,88.004 h1.52
  text "IN" at 64.829,87.579 h1.52